# Altium PCB sallenKey_2.PcbDoc
Units mm, origin at the board's own origin, x right, y up, seen from the top; angles counter-clockwise.
Board outline 100 x 100 mm, 2 copper layers (Top Layer, Bottom Layer); 122 components, 58 nets, 265 pads, 18 vias.
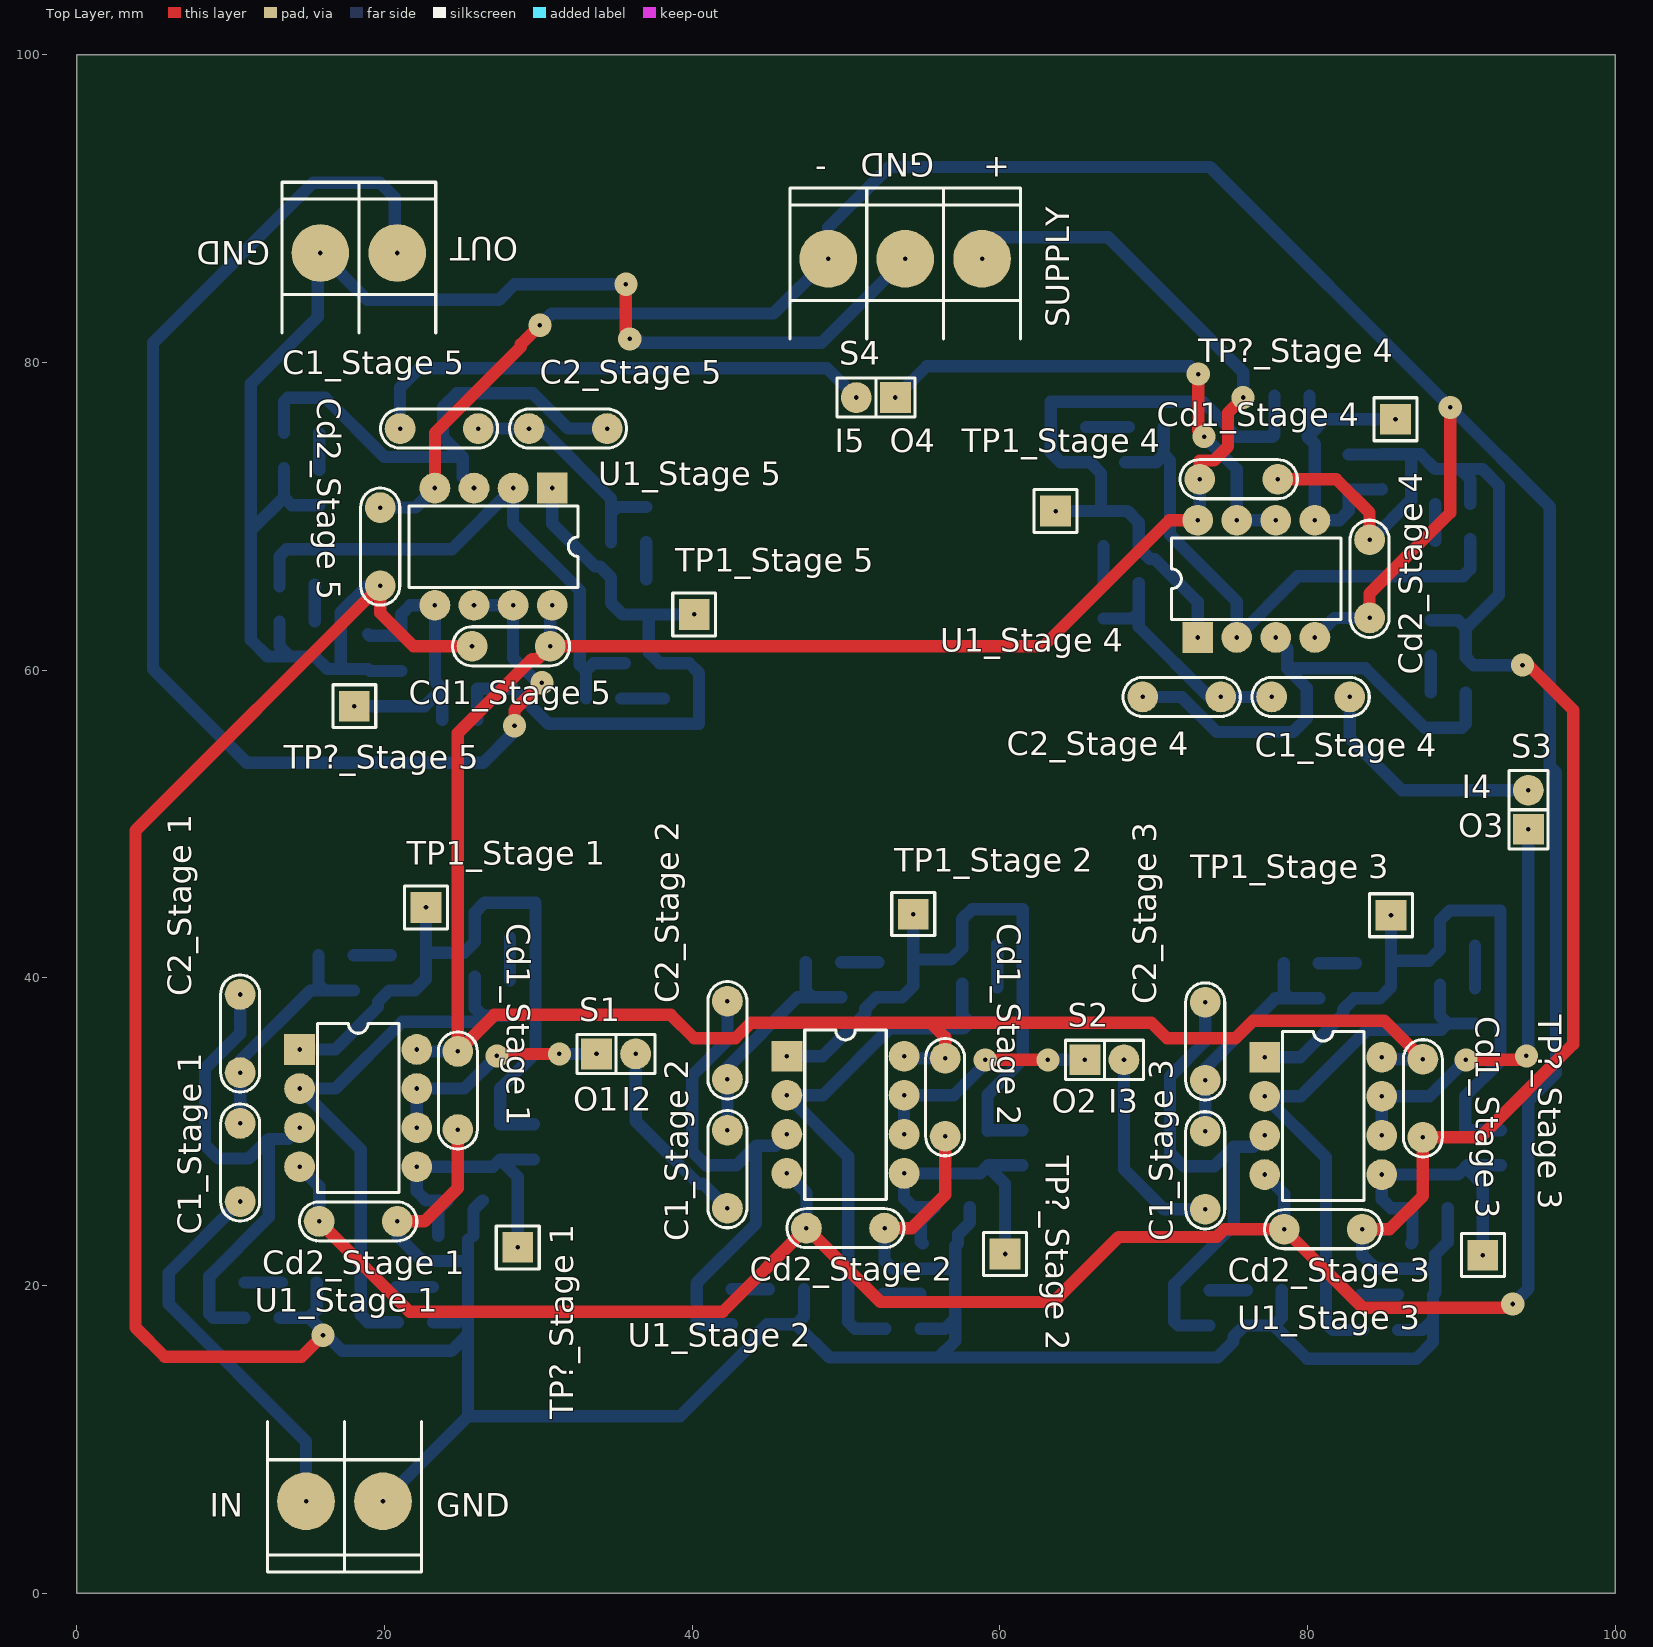
[diagram p0: Top Layer view]
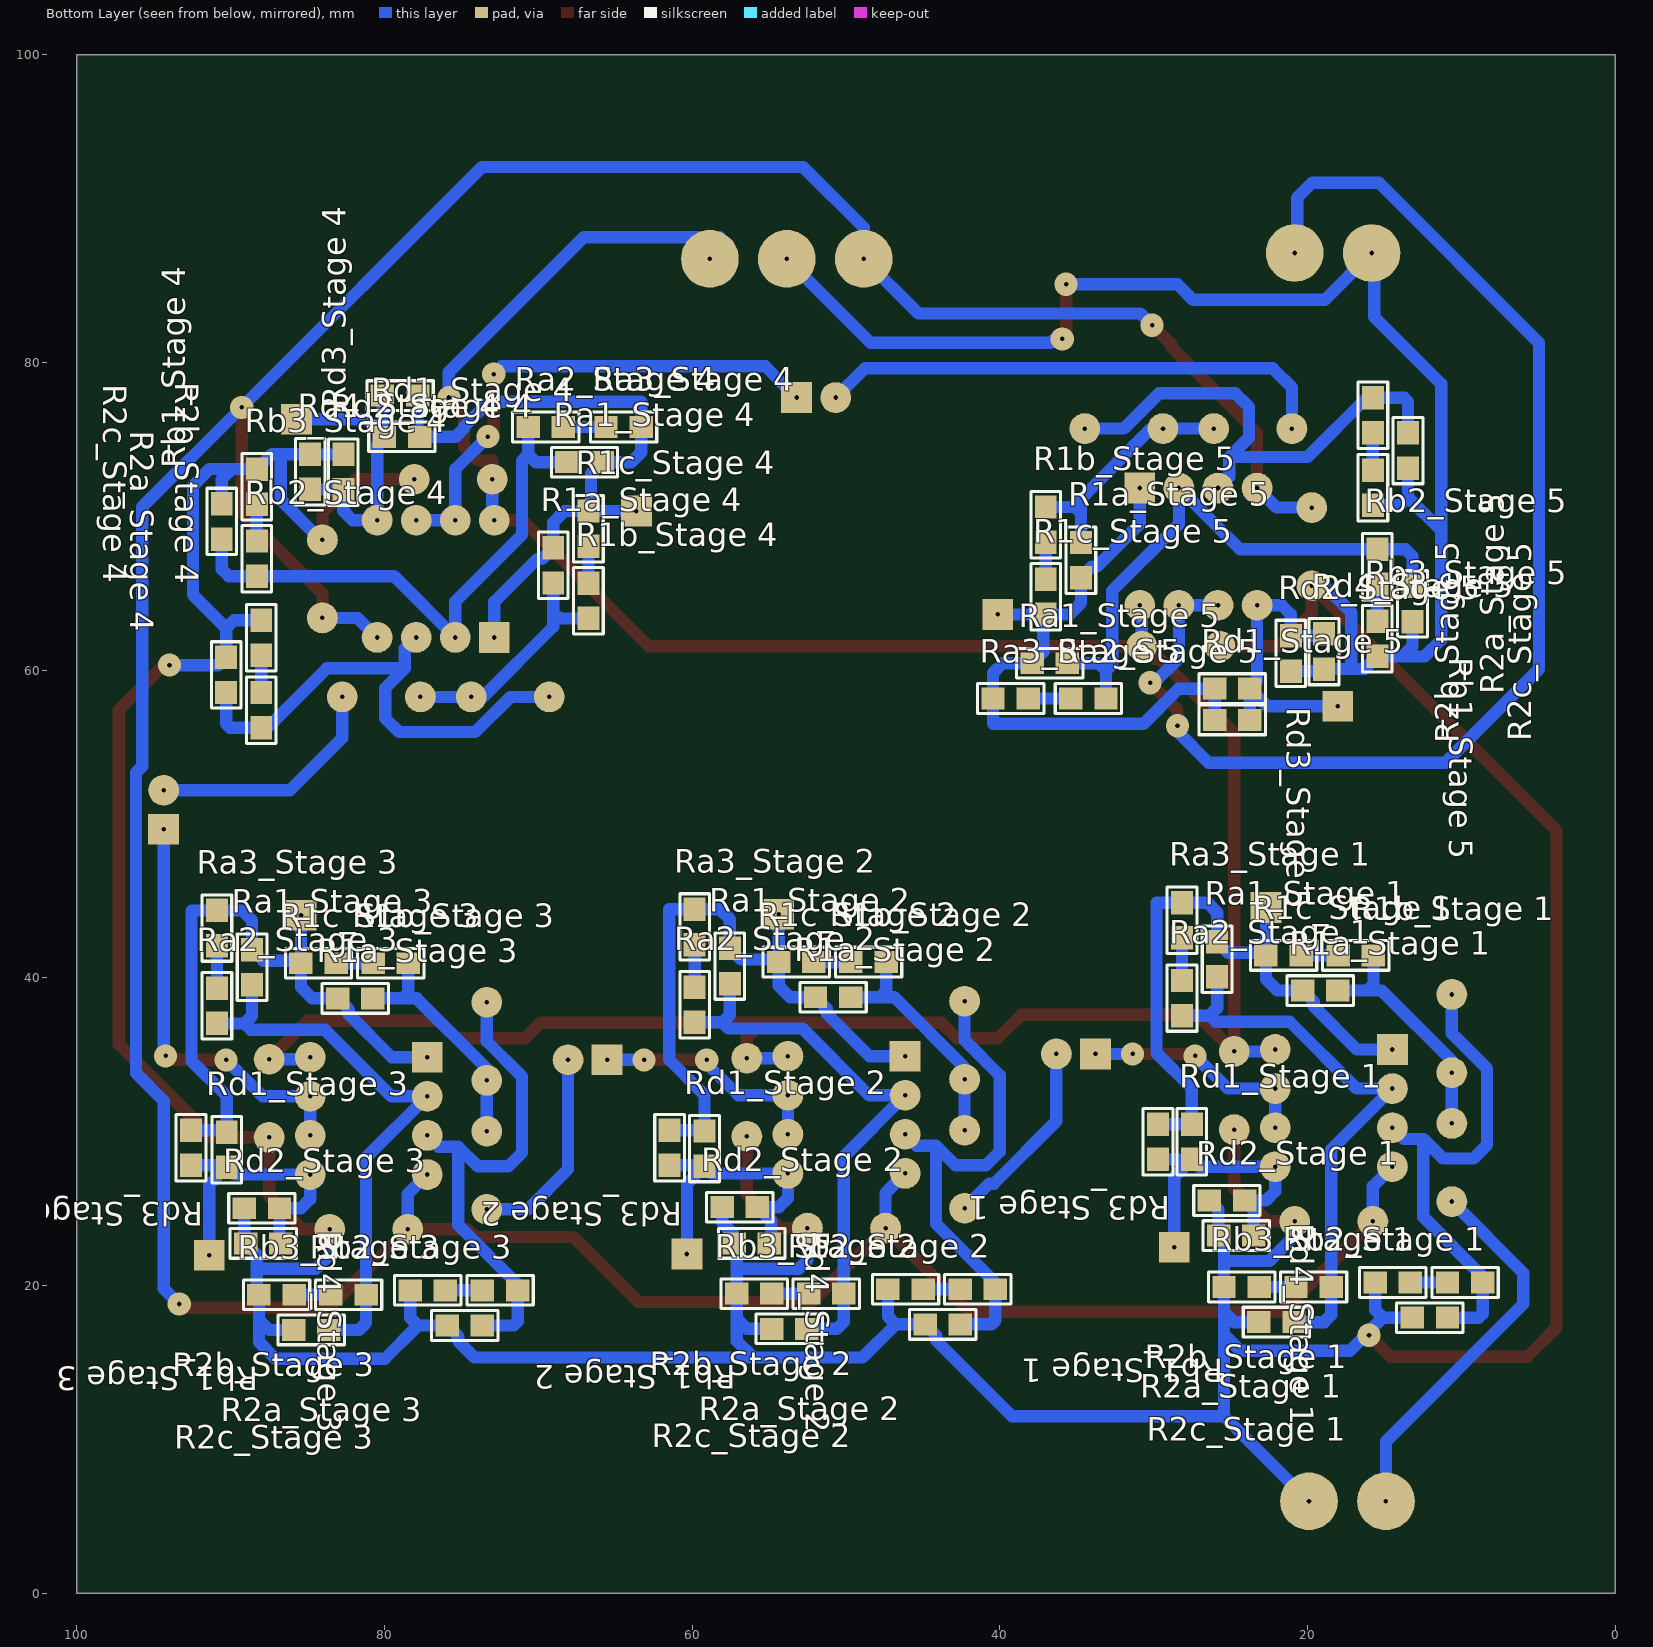
[diagram p1: Bottom Layer view, seen from below]
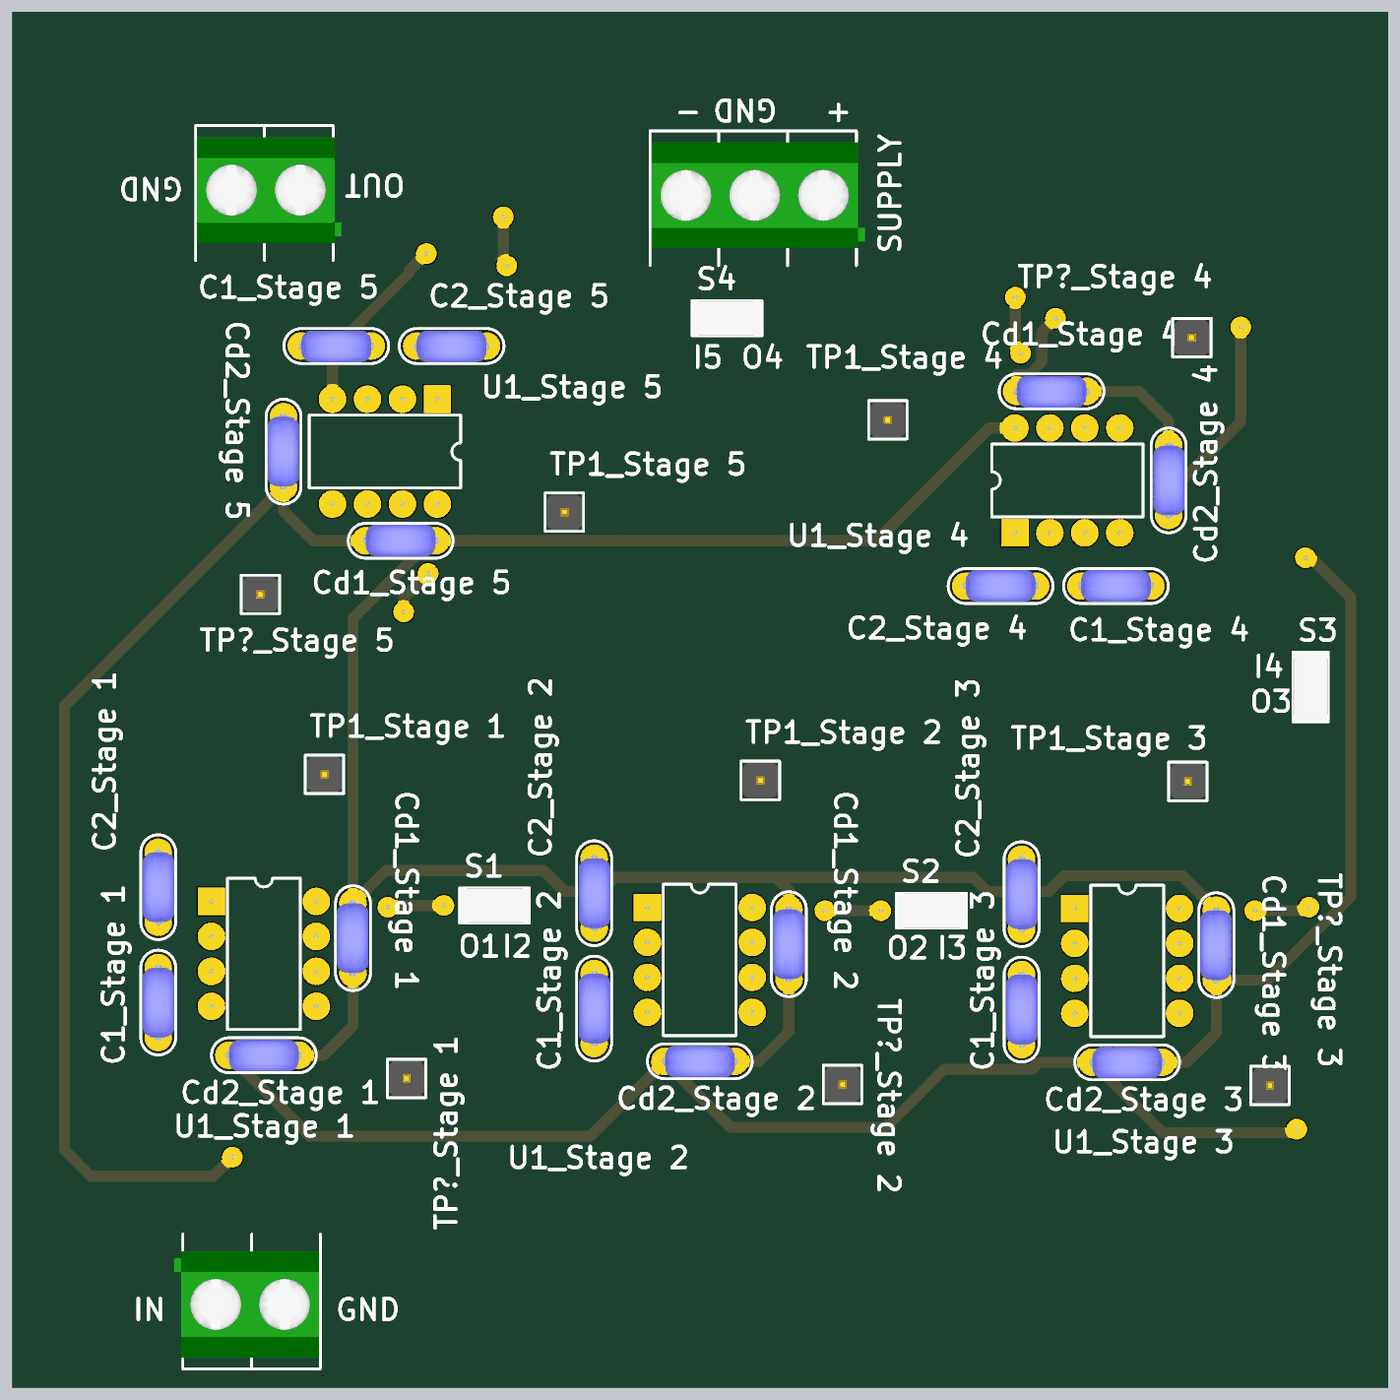
[diagram p2: 3D render of the assembled board from above, using the file's embedded part models]
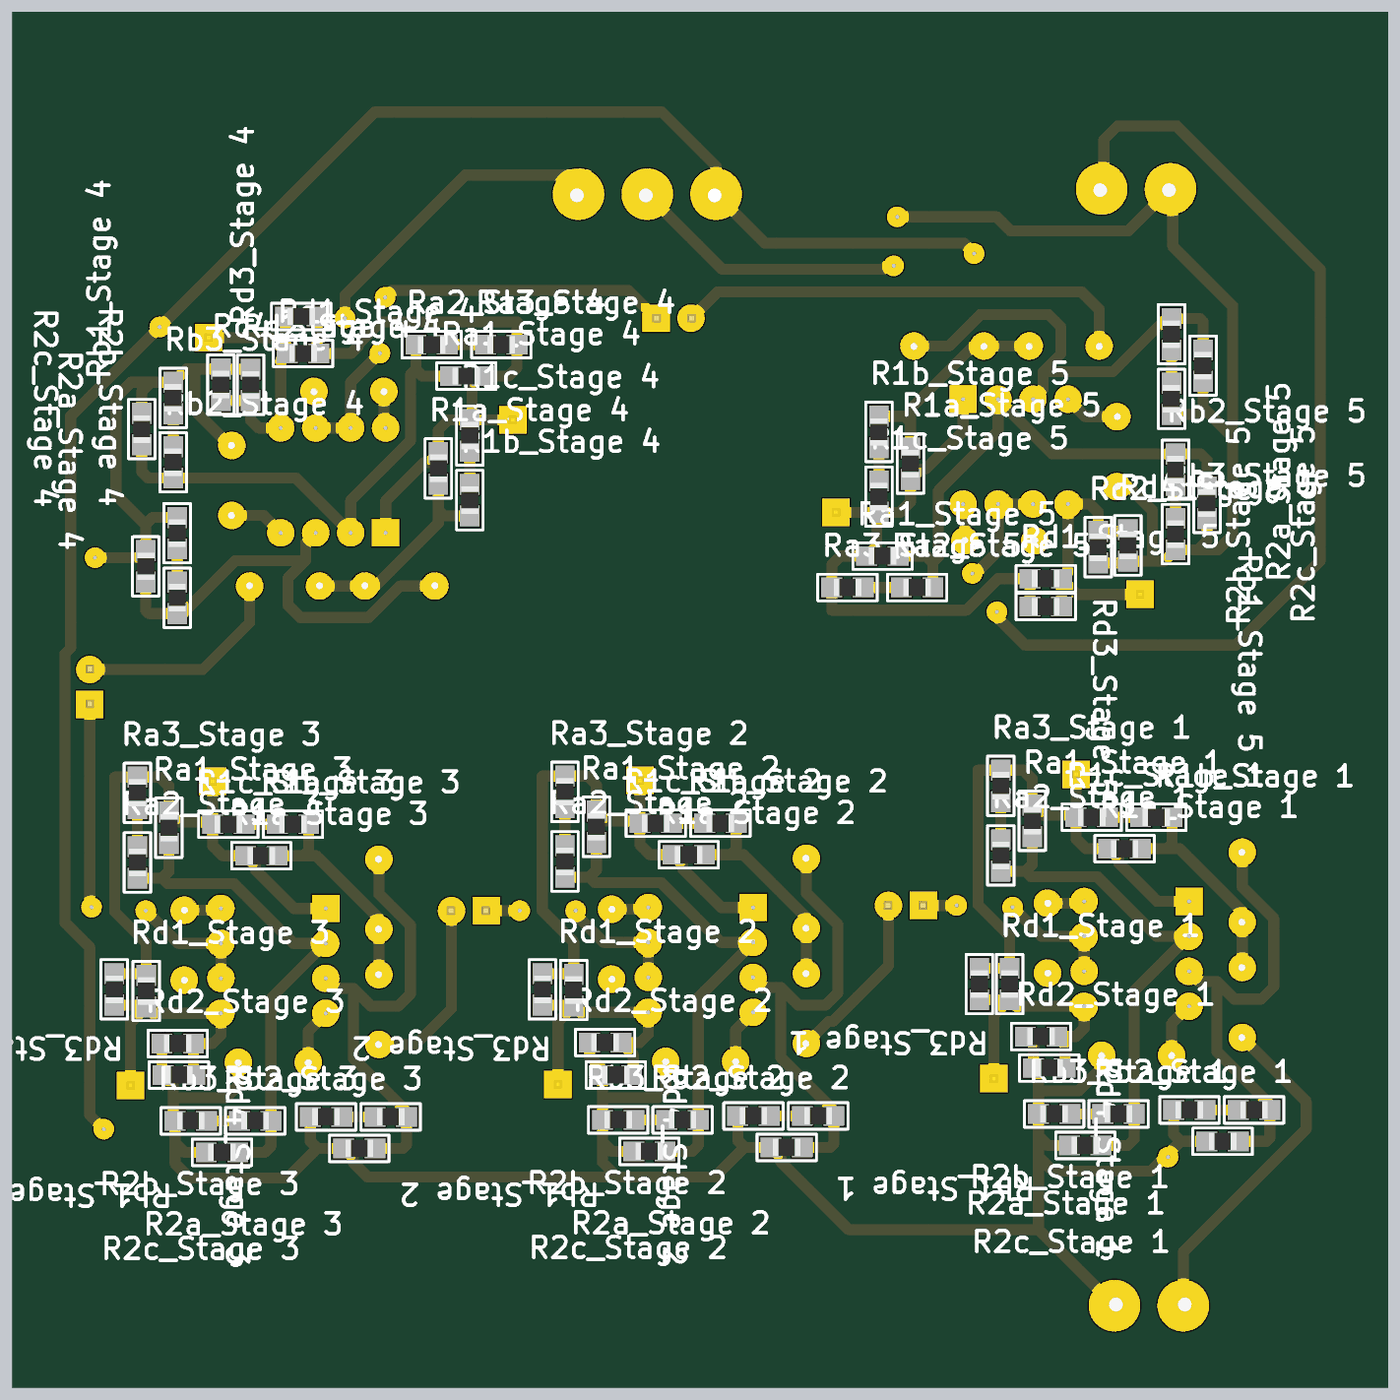
[diagram p3: 3D render of the assembled board from below, using the file's embedded part models]

## Layer stack, top to bottom
Top Solder: solder mask 0.0102, Solder Resist, Dk 3.5
Top Layer: signal copper 0.0356
Dielectric 1: dielectric 0.32, FR-4, Dk 4.8
Bottom Layer: signal copper 0.0356
Bottom Solder: solder mask 0.0102, Solder Resist, Dk 3.5

## Board outline
0,0 100,0 100,100 0,100

## Design rules (kind name [scope] priority, off if disabled: settings)
Clearance [All] p1: gap=0.4 ignorepadtopadclearanceinfootprint=FALSE
PolygonConnect [All] p1: connectstyle=Relief reliefconductorwidth=0.254 reliefentries=4 polygonreliefangle="90 Angle" airgapwidth=0.254
RoomDefinition "Stage 5" [InComponentClass('Stage 5')] p1: confinementstyle=ConfineIn formatcopy=TRUE lockcomponents=FALSE outline 9.906,55.626 43.815,55.626 43.815,79.462 9.906,79.462
RoomDefinition "Stage 4" [InComponentClass('Stage 4')] p2: confinementstyle=ConfineIn formatcopy=TRUE lockcomponents=FALSE outline 93.853,80.137 59.944,80.137 59.944,54.508 93.853,54.508
RoomDefinition "Stage 3" [InComponentClass('Stage 3')] p3: confinementstyle=ConfineIn formatcopy=TRUE lockcomponents=FALSE outline 93.98,13.843 93.98,47.752 69.596,47.752 69.596,13.843
RoomDefinition "Stage 2" [InComponentClass('Stage 2')] p4: confinementstyle=ConfineIn formatcopy=TRUE lockcomponents=FALSE outline 62.738,13.914 62.738,47.823 38.537,47.823 38.537,13.914
RoomDefinition "Stage 1" [InComponentClass('Stage 1')] p5: confinementstyle=ConfineIn formatcopy=TRUE lockcomponents=FALSE outline 30.861,14.351 30.861,48.26 6.858,48.26 6.858,14.351
RoutingVias [All] p1: holewidth=0.3 width=2 viastyle="Through Hole" minholewidth=0.3 minwidth=2 maxholewidth=0.3 maxwidth=2
SolderMaskExpansion [All] p1: expansion=0.102
Width [All] p1: maxlimit=0.9 minlimit=0.7 preferedwidth=0.8
30 further rules are at their usual default settings.

## Classes and differential pairs
channel class filtroFinal: "Stage 1" "Stage 2" "Stage 3" "Stage 4" "Stage 5"
component class "Stage 5": "C1_Stage 5" "C2_Stage 5" "Cd1_Stage 5" "Cd2_Stage 5" "R1a_Stage 5" "R1b_Stage 5" "R1c_Stage 5" "R2a_Stage 5" "R2b_Stage 5" "R2c_Stage 5" "Ra1_Stage 5" "Ra2_Stage 5" "Ra3_Stage 5" "Rb1_Stage 5" "Rb2_Stage 5" "Rb3_Stage 5" "Rd1_Stage 5" "Rd2_Stage 5" "Rd3_Stage 5" "Rd4_Stage 5" "TP1_Stage 5" "TP?_Stage 5" "U1_Stage 5"
component class "Stage 4": "C1_Stage 4" "C2_Stage 4" "Cd1_Stage 4" "Cd2_Stage 4" "R1a_Stage 4" "R1b_Stage 4" "R1c_Stage 4" "R2a_Stage 4" "R2b_Stage 4" "R2c_Stage 4" "Ra1_Stage 4" "Ra2_Stage 4" "Ra3_Stage 4" "Rb1_Stage 4" "Rb2_Stage 4" "Rb3_Stage 4" "Rd1_Stage 4" "Rd2_Stage 4" "Rd3_Stage 4" "Rd4_Stage 4" "TP1_Stage 4" "TP?_Stage 4" "U1_Stage 4"
component class "Stage 3": "C1_Stage 3" "C2_Stage 3" "Cd1_Stage 3" "Cd2_Stage 3" "R1a_Stage 3" "R1b_Stage 3" "R1c_Stage 3" "R2a_Stage 3" "R2b_Stage 3" "R2c_Stage 3" "Ra1_Stage 3" "Ra2_Stage 3" "Ra3_Stage 3" "Rb1_Stage 3" "Rb2_Stage 3" "Rb3_Stage 3" "Rd1_Stage 3" "Rd2_Stage 3" "Rd3_Stage 3" "Rd4_Stage 3" "TP1_Stage 3" "TP?_Stage 3" "U1_Stage 3"
component class "Stage 2": "C1_Stage 2" "C2_Stage 2" "Cd1_Stage 2" "Cd2_Stage 2" "R1a_Stage 2" "R1b_Stage 2" "R1c_Stage 2" "R2a_Stage 2" "R2b_Stage 2" "R2c_Stage 2" "Ra1_Stage 2" "Ra2_Stage 2" "Ra3_Stage 2" "Rb1_Stage 2" "Rb2_Stage 2" "Rb3_Stage 2" "Rd1_Stage 2" "Rd2_Stage 2" "Rd3_Stage 2" "Rd4_Stage 2" "TP1_Stage 2" "TP?_Stage 2" "U1_Stage 2"
component class "Stage 1": "C1_Stage 1" "C2_Stage 1" "Cd1_Stage 1" "Cd2_Stage 1" "R1a_Stage 1" "R1b_Stage 1" "R1c_Stage 1" "R2a_Stage 1" "R2b_Stage 1" "R2c_Stage 1" "Ra1_Stage 1" "Ra2_Stage 1" "Ra3_Stage 1" "Rb1_Stage 1" "Rb2_Stage 1" "Rb3_Stage 1" "Rd1_Stage 1" "Rd2_Stage 1" "Rd3_Stage 1" "TP1_Stage 1" "TP?_Stage 1" "U1_Stage 1"
component class finalFilter: IN OUT S1 S2 S3 S4 SUPPLY

## Components (designator, comment, footprint, x,y, rotation, side; value= is the part's Value field where it differs from the comment)
"C1_Stage 1" "CAP" CAP200 10.612,27.996 r90 top (schematic designator C1)
"C1_Stage 2" "CAP" CAP200 42.291,27.559 r90 top (schematic designator C1)
"C1_Stage 3" "CAP" CAP200 73.35,27.488 r90 top (schematic designator C1)
"C1_Stage 4" "CAP" CAP200 80.208,58.262 r180 top (schematic designator C1)
"C1_Stage 5" "CAP" CAP200 23.551,75.707 r0 top (schematic designator C1)
"C2_Stage 1" "CAP" CAP200 10.612,36.378 r90 top (schematic designator C2)
"C2_Stage 2" "CAP" CAP200 42.291,35.941 r90 top (schematic designator C2)
"C2_Stage 3" "CAP" CAP200 73.35,35.87 r90 top (schematic designator C2)
"C2_Stage 4" "CAP" CAP200 71.826,58.262 r180 top (schematic designator C2)
"C2_Stage 5" "CAP" CAP200 31.933,75.707 r0 top (schematic designator C2)
"Cd1_Stage 1" "CAP" CAP200 24.765,32.674 r270 top (schematic designator Cd1)
"Cd1_Stage 2" "CAP" CAP200 56.444,32.238 r270 top (schematic designator Cd1)
"Cd1_Stage 3" "CAP" CAP200 87.503,32.166 r270 top (schematic designator Cd1)
"Cd1_Stage 4" "CAP" CAP200 75.53,72.415 r0 top (schematic designator Cd1)
"Cd1_Stage 5" "CAP" CAP200 28.229,61.555 r180 top (schematic designator Cd1)
"Cd2_Stage 1" "CAP" CAP200 18.288,24.165 r0 top (schematic designator Cd2)
"Cd2_Stage 2" "CAP" CAP200 49.967,23.729 r0 top (schematic designator Cd2)
"Cd2_Stage 3" "CAP" CAP200 81.026,23.657 r0 top (schematic designator Cd2)
"Cd2_Stage 4" "CAP" CAP200 84.039,65.938 r90 top (schematic designator Cd2)
"Cd2_Stage 5" "CAP" CAP200 19.72,68.032 r270 top (schematic designator Cd2)
IN "BORNERA 2" BORNERA2 17.399,5.969 r90 top
OUT "BORNERA 2" BORNERA2 18.328,87.122 r270 top
"R1a_Stage 1" "RES" 0805 19.162,39.172 r180 bottom (schematic designator R1a)
"R1a_Stage 2" "RES" 0805 50.841,38.735 r180 bottom (schematic designator R1a)
"R1a_Stage 3" "RES" 0805 81.9,38.664 r180 bottom (schematic designator R1a)
"R1a_Stage 4" "RES" 0805 69.032,66.812 r270 bottom (schematic designator R1a)
"R1a_Stage 5" "RES" 0805 34.727,67.157 r90 bottom (schematic designator R1a)
"R1b_Stage 1" "RES" 0805 16.856,41.458 r180 bottom (schematic designator R1b)
"R1b_Stage 2" "RES" 0805 48.534,41.021 r180 bottom (schematic designator R1b)
"R1b_Stage 3" "RES" 0805 79.594,40.95 r180 bottom (schematic designator R1b)
"R1b_Stage 4" "RES" 0805 66.746,64.506 r270 bottom (schematic designator R1b)
"R1b_Stage 5" "RES" 0805 37.013,69.464 r90 bottom (schematic designator R1b)
"R1c_Stage 1" "RES" 0805 21.555,41.458 r180 bottom (schematic designator R1c)
"R1c_Stage 2" "RES" 0805 53.233,41.021 r180 bottom (schematic designator R1c)
"R1c_Stage 3" "RES" 0805 84.293,40.95 r180 bottom (schematic designator R1c)
"R1c_Stage 4" "RES" 0805 66.746,69.205 r270 bottom (schematic designator R1c)
"R1c_Stage 5" "RES" 0805 37.013,64.765 r90 bottom (schematic designator R1c)
"R2a_Stage 1" "RES" 0805 12.04,17.907 r180 bottom (schematic designator R2a)
"R2a_Stage 2" "RES" 0805 43.719,17.47 r180 bottom (schematic designator R2a)
"R2a_Stage 3" "RES" 0805 74.778,17.399 r180 bottom (schematic designator R2a)
"R2a_Stage 4" "RES" 0805 90.297,59.69 r270 bottom (schematic designator R2a)
"R2a_Stage 5" "RES" 0805 13.462,74.28 r90 bottom (schematic designator R2a)
"R2b_Stage 1" "RES" 0805 9.754,20.193 r180 bottom (schematic designator R2b)
"R2b_Stage 2" "RES" 0805 41.433,19.756 r180 bottom (schematic designator R2b)
"R2b_Stage 3" "RES" 0805 72.492,19.685 r180 bottom (schematic designator R2b)
"R2b_Stage 4" "RES" 0805 88.011,57.404 r270 bottom (schematic designator R2b)
"R2b_Stage 5" "RES" 0805 15.748,76.566 r90 bottom (schematic designator R2b)
"R2c_Stage 1" "RES" 0805 14.453,20.193 r180 bottom (schematic designator R2c)
"R2c_Stage 2" "RES" 0805 46.132,19.756 r180 bottom (schematic designator R2c)
"R2c_Stage 3" "RES" 0805 77.191,19.685 r180 bottom (schematic designator R2c)
"R2c_Stage 4" "RES" 0805 88.011,62.103 r270 bottom (schematic designator R2c)
"R2c_Stage 5" "RES" 0805 15.748,71.867 r90 bottom (schematic designator R2c)
"Ra1_Stage 1" "RES" 0805 25.873,41.204 r270 bottom (schematic designator Ra1)
"Ra1_Stage 2" "RES" 0805 57.551,40.767 r270 bottom (schematic designator Ra1)
"Ra1_Stage 3" "RES" 0805 88.611,40.696 r270 bottom (schematic designator Ra1)
"Ra1_Stage 4" "RES" 0805 67,73.523 r0 bottom (schematic designator Ra1)
"Ra1_Stage 5" "RES" 0805 36.759,60.447 r180 bottom (schematic designator Ra1)
"Ra2_Stage 1" "RES" 0805 28.159,38.684 r270 bottom (schematic designator Ra2)
"Ra2_Stage 2" "RES" 0805 59.837,38.247 r270 bottom (schematic designator Ra2)
"Ra2_Stage 3" "RES" 0805 90.897,38.176 r270 bottom (schematic designator Ra2)
"Ra2_Stage 4" "RES" 0805 69.52,75.809 r0 bottom (schematic designator Ra2)
"Ra2_Stage 5" "RES" 0805 34.239,58.161 r180 bottom (schematic designator Ra2)
"Ra3_Stage 1" "RES" 0805 28.159,43.744 r270 bottom (schematic designator Ra3)
"Ra3_Stage 2" "RES" 0805 59.837,43.307 r270 bottom (schematic designator Ra3)
"Ra3_Stage 3" "RES" 0805 90.897,43.236 r270 bottom (schematic designator Ra3)
"Ra3_Stage 4" "RES" 0805 64.46,75.809 r0 bottom (schematic designator Ra3)
"Ra3_Stage 5" "RES" 0805 39.299,58.161 r180 bottom (schematic designator Ra3)
"Rb1_Stage 1" "RES" 0805 22.017,17.618 r180 bottom (schematic designator Rb1)
"Rb1_Stage 2" "RES" 0805 53.696,17.181 r180 bottom (schematic designator Rb1)
"Rb1_Stage 3" "RES" 0805 84.755,17.11 r180 bottom (schematic designator Rb1)
"Rb1_Stage 4" "RES" 0805 90.586,69.667 r270 bottom (schematic designator Rb1)
"Rb1_Stage 5" "RES" 0805 13.173,64.302 r90 bottom (schematic designator Rb1)
"Rb2_Stage 1" "RES" 0805 19.604,19.904 r180 bottom (schematic designator Rb2)
"Rb2_Stage 2" "RES" 0805 51.283,19.467 r180 bottom (schematic designator Rb2)
"Rb2_Stage 3" "RES" 0805 82.342,19.396 r180 bottom (schematic designator Rb2)
"Rb2_Stage 4" "RES" 0805 88.3,67.254 r270 bottom (schematic designator Rb2)
"Rb2_Stage 5" "RES" 0805 15.459,66.715 r90 bottom (schematic designator Rb2)
"Rb3_Stage 1" "RES" 0805 24.283,19.904 r180 bottom (schematic designator Rb3)
"Rb3_Stage 2" "RES" 0805 55.962,19.467 r180 bottom (schematic designator Rb3)
"Rb3_Stage 3" "RES" 0805 87.021,19.396 r180 bottom (schematic designator Rb3)
"Rb3_Stage 4" "RES" 0805 88.3,71.933 r270 bottom (schematic designator Rb3)
"Rb3_Stage 5" "RES" 0805 15.459,62.037 r90 bottom (schematic designator Rb3)
"Rd1_Stage 1" "RES" 0805 27.519,29.337 r270 bottom (schematic designator Rd1)
"Rd1_Stage 2" "RES" 0805 59.197,28.9 r270 bottom (schematic designator Rd1)
"Rd1_Stage 3" "RES" 0805 90.257,28.829 r270 bottom (schematic designator Rd1)
"Rd1_Stage 4" "RES" 0805 78.867,75.169 r0 bottom (schematic designator Rd1)
"Rd1_Stage 5" "RES" 0805 24.892,58.801 r180 bottom (schematic designator Rd1)
"Rd2_Stage 1" "RES" 0805 25.233,25.527 r180 bottom (schematic designator Rd2)
"Rd2_Stage 2" "RES" 0805 56.911,25.09 r180 bottom (schematic designator Rd2)
"Rd2_Stage 3" "RES" 0805 87.971,25.019 r180 bottom (schematic designator Rd2)
"Rd2_Stage 4" "RES" 0805 82.677,72.883 r270 bottom (schematic designator Rd2)
"Rd2_Stage 5" "RES" 0805 21.082,61.087 r90 bottom (schematic designator Rd2)
"Rd3_Stage 1" "RES" 0805 29.718,29.337 r270 bottom (schematic designator Rd3)
"Rd3_Stage 2" "RES" 0805 61.468,28.956 r270 bottom (schematic designator Rd3)
"Rd3_Stage 3" "RES" 0805 92.583,28.956 r270 bottom (schematic designator Rd3)
"Rd3_Stage 4" "RES" 0805 78.994,77.851 r0 bottom (schematic designator Rd3)
"Rd3_Stage 5" "RES" 0805 24.892,56.769 r180 bottom (schematic designator Rd3)
"Rd4_Stage 1" "RES" 0805 24.638,23.241 r180 bottom (schematic designator Rd4)
"Rd4_Stage 2" "RES" 0805 56.134,22.733 r180 bottom (schematic designator Rd4)
"Rd4_Stage 3" "RES" 0805 87.884,22.733 r180 bottom (schematic designator Rd4)
"Rd4_Stage 4" "RES" 0805 84.836,72.898 r270 bottom (schematic designator Rd4)
"Rd4_Stage 5" "RES" 0805 18.923,61.214 r90 bottom (schematic designator Rd4)
S1 "JUMPER" JUMPER2 35.052,35.052 r0 top
S2 "JUMPER" JUMPER2 66.802,34.671 r0 top
S3 "JUMPER" JUMPER2 94.361,50.927 r90 top
S4 "JUMPER" JUMPER2 51.943,77.724 r180 top
SUPPLY "BORNERA 3" BORNERA3 53.848,86.741 r270 top
"TP1_Stage 1" "TP" TPTH 22.693,44.577 r180 top (schematic designator TP1)
"TP1_Stage 2" "TP" TPTH 54.371,44.14 r180 top (schematic designator TP1)
"TP1_Stage 3" "TP" TPTH 85.431,44.069 r180 top (schematic designator TP1)
"TP1_Stage 4" "TP" TPTH 63.627,70.343 r270 top (schematic designator TP1)
"TP1_Stage 5" "TP" TPTH 40.132,63.627 r90 top (schematic designator TP1)
"TP?_Stage 1" "TP" TPTH 28.662,22.479 r180 top (schematic designator TP?)
"TP?_Stage 2" "TP" TPTH 60.34,22.042 r180 top (schematic designator TP?)
"TP?_Stage 3" "TP" TPTH 91.4,21.971 r180 top (schematic designator TP?)
"TP?_Stage 4" "TP" TPTH 85.725,76.312 r270 top (schematic designator TP?)
"TP?_Stage 5" "TP" TPTH 18.034,57.658 r90 top (schematic designator TP?)
"U1_Stage 1" "TL082P" P008 18.288,31.531 r270 top (schematic designator U1)
"U1_Stage 2" "TL082P" P008 49.967,31.095 r270 top (schematic designator U1)
"U1_Stage 3" "TL082P" P008 81.026,31.023 r270 top (schematic designator U1)
"U1_Stage 4" "TL082P" P008 76.673,65.938 r0 top (schematic designator U1)
"U1_Stage 5" "TL082P" P008 27.086,68.032 r180 top (schematic designator U1)

## Footprints (in the part's own frame and the unit in brackets; to place one, negate y for a bottom-side part, rotate by r counter-clockwise, add the part's x,y. Pads: shape width x height; smd on the part's side, far side on the other; paste and mask are expansions set on the pad)
0805 [mil] "Pasivo 0805"
  rect 60x56 smd: 1(-45,0) 2(45,0)
  silkscreen extent -85,-38 85,38, body extent -40,-25 39,25, height 15
BORNERA2 [mm] "Bornera con Tornillos 5mm separación"
  round 3.75 hole 0.3: 1(0,2.5) 2(0,-2.5)
  silkscreen extent -4.6,-5 5.2,5, body extent -3.76,-4.89 3.94,5.61, height 10
BORNERA3 [mm] "Bornera con Tornillos 5mm separación"
  round 3.75 hole 0.3: 1(0,5) 2(0,0) 3(0,-5)
  silkscreen extent -4.6,-7.5 5.2,7.5, body extent -3.76,-7.39 3.94,8.11, height 10.05
CAP200 [mm]
  round 2 hole 0.3: 1(-2.54,0) 2(2.54,0)
  silkscreen extent -3.81,-1.27 3.81,1.27, body extent -2.79,-1.17 2.79,1.12, height 6.24
JUMPER2 [mm]
  rect 2x2 hole 0.3: 1(-1.27,0)
  round 2 hole 0.3: 2(1.27,0)
  silkscreen extent -2.54,-1.27 2.54,1.27, body extent -2.46,-1.27 2.54,1.27, height 9.5
P008 [mm] "DIP; 8 Leads; Row Spacing 7.62 mm; Pitch 2.54 mm"
  rect 2x2 hole 0.3: 1(-3.81,-3.81)
  round 2 hole 0.3: 2(-1.27,-3.81) 3(1.27,-3.81) 4(3.81,-3.81) 5(3.81,3.81) 6(1.27,3.81) 7(-1.27,3.81) 8(-3.81,3.81)
  silkscreen extent -5.5,-2.65 5.5,2.65
TPTH [mm]
  rect 2x2 hole 0.3: 1(0,0)
  silkscreen extent -1.4,-1.4 1.4,1.4, body extent -1.27,-1.27 1.27,1.27, height 6.04

## Part data
"U1_Stage 1" "U1_Stage 2" "U1_Stage 3" "U1_Stage 4" "U1_Stage 5": "JFET-Input Operational Amplifier", Code_JEDEC=MO-001-AN, ComponentLink1Description="Manufacturer Link", ComponentLink1URL=http://www.ti.com/, ComponentLink2Description=Datasheet, ComponentLink2URL=http://www-s.ti.com/sc/ds/tl082.pdf, DatasheetVersion=Feb-1999, LatestRevisionDate=04-Mar-2005, LatestRevisionNote="Stylized 3D Model Added.", PackageDescription="DIP; 8 Leads; Row Spacing 7.62 mm; Pitch 2.54 mm", PackageReference=P008, PackageVersion=Jun-1999, Published=16-Jan-2001, Publisher="Altium Limited"

## Via types
v1: diameter 1.5, hole 0.3, Top Layer to Bottom Layer, 18 vias

## Nets (pads, with @x,y where several pads share a name; then routed paths per layer and width w, separated by ;. In a path a pad name is that pad's centre, name@x,y a point inside that pad or via, vN(x,y) a via of type N, cw(c..) or ccw(c..) an arc to the next point about the centre after c; other vN are vias at no path point)
GND: "Cd1_Stage 1.2" "Cd1_Stage 2.2" "Cd1_Stage 3.2" "Cd1_Stage 4.2" "Cd1_Stage 5.2" "Cd2_Stage 1.2" "Cd2_Stage 2.2" "Cd2_Stage 3.2" "Cd2_Stage 4.2" "Cd2_Stage 5.2" "R2a_Stage 1.1" "R2a_Stage 2.1" "R2a_Stage 3.1" "R2a_Stage 4.1" "R2a_Stage 5.1" "R2c_Stage 1.1" "R2c_Stage 2.1" "R2c_Stage 3.1" "R2c_Stage 4.1" "R2c_Stage 5.1" "Rb1_Stage 1.1" "Rb1_Stage 2.1" "Rb1_Stage 3.1" "Rb1_Stage 4.1" "Rb1_Stage 5.1" "Rb3_Stage 1.1" "Rb3_Stage 2.1" "Rb3_Stage 3.1" "Rb3_Stage 4.1" "Rb3_Stage 5.1" "Rd2_Stage 1.1" "Rd2_Stage 2.1" "Rd2_Stage 3.1" "Rd2_Stage 4.1" "Rd2_Stage 5.1" "Rd4_Stage 1.1" "Rd4_Stage 2.1" "Rd4_Stage 3.1" "Rd4_Stage 4.1" "Rd4_Stage 5.1" IN.2 OUT.2 SUPPLY.2 | length 447.4
  Top Layer w0.8: v1(16.002,16.764) 14.605,15.367 5.715,15.367 3.81,17.272 3.81,49.581 19.72,65.492 19.72,63.719 21.884,61.555 25.689,61.555 ; 20.828,24.165 22.601,24.165 24.765,26.329 24.765,30.134 ; v1(35.687,85.09) 35.687,81.788 v1(35.941,81.534) ; 52.507,23.729 54.28,23.729 56.444,25.893 56.444,29.698 ; 78.07,72.415 81.875,72.415 84.039,70.251 84.039,68.478 ; 83.566,23.657 85.339,23.657 87.503,25.821 87.503,29.626 91.221,29.626 97.282,35.687 97.282,57.404 94.361,60.325 v1(93.98,60.325)
  Bottom Layer w0.8: 13.173,63.159 13.173,61.56 13.839,60.894 ; 13.183,17.907 15.088,17.907 ; 13.462,73.137 13.462,71.232 ; 15.596,20.193 15.596,18.415 15.088,17.907 ; 15.748,70.724 13.97,70.724 13.462,71.232 ; 19.72,65.492 18.883,65.492 17.145,63.754 17.145,60.071 ; IN.2 25.426,11.496 ; 20.828,24.165 20.828,23.241 22.479,21.59 25.426,21.59 ; 21.082,59.944 19.05,59.944 18.923,60.071 17.145,60.071 ; 23.16,17.618 24.76,17.618 25.426,18.284 ; 25.426,22.987 25.426,21.59 ; 25.781,23.241 25.781,24.932 26.376,25.527 ; v1(35.687,85.09) 28.448,85.09 27.432,84.074 18.876,84.074 OUT.2 15.661,86.955 15.661,82.971 11.303,78.613 11.303,69.073 ; v1(35.941,81.534) 36.449,81.534 36.703,81.28 48.387,81.28 SUPPLY.2 ; 47.275,19.756 47.275,17.978 46.767,17.47 ; 52.507,23.729 52.507,21.638 53.063,21.082 57.105,21.082 ; 54.839,17.181 56.439,17.181 57.105,17.847 ; 58.054,25.09 58.054,24.1 57.277,23.322 57.277,22.733 57.105,22.561 57.105,21.082 ; 78.334,19.685 78.334,17.907 77.826,17.399 ; 82.677,74.026 84.821,74.026 84.836,74.041 86.741,74.041 ; 83.566,23.657 83.566,21.971 84.455,21.082 88.303,21.082 ; 84.039,68.478 84.164,68.478 86.741,71.055 86.741,74.041 ; 85.898,17.11 87.498,17.11 88.164,17.776 ; 88.011,63.246 89.789,63.246 90.297,62.738 ; 89.114,25.019 89.114,22.82 89.027,22.733 88.303,22.009 88.303,21.082 ; 90.586,70.81 90.586,72.41 89.92,73.076 ; v1(93.98,60.325) 90.805,60.325 90.297,60.833 90.297,62.738 ; 11.303,69.073 11.303,61.976 12.385,60.894 13.839,60.894 ; 11.303,69.073 13.462,71.232 ; 13.839,60.894 15.459,60.894 16.281,60.071 17.145,60.071 ; 15.088,17.907 17.247,15.748 24.344,15.748 25.426,16.83 ; 25.426,11.496 39.206,11.496 44.138,16.428 44.138,16.746 44.862,17.47 46.767,17.47 ; 25.426,11.496 25.426,16.83 ; 25.426,16.83 25.426,18.284 ; 25.426,18.284 25.426,19.904 25.426,21.59 ; 46.767,17.47 48.926,15.311 56.022,15.311 ; 56.022,15.311 74.152,15.311 75.197,16.356 75.197,16.675 75.921,17.399 77.826,17.399 ; 56.022,15.311 57.105,16.393 57.105,17.847 ; 57.105,17.847 57.105,19.467 57.105,21.082 ; 77.826,17.399 79.985,15.24 87.082,15.24 88.164,16.322 88.164,17.776 ; 86.741,74.041 87.335,74.041 88.3,73.076 89.92,73.076 ; 88.164,17.776 88.164,19.396 88.303,19.535 88.303,21.082 ; 89.92,73.076 91.374,73.076 92.456,71.994 92.456,64.897 90.297,62.738
"NetC1_Stage 1_1": "C1_Stage 1.1" IN.1 | length 25.1
  Bottom Layer w0.8: 10.612,25.456 5.969,20.813 5.969,18.796 14.899,9.866 IN.1
"NetC1_Stage 1_2": "C1_Stage 1.2" "C2_Stage 1.1" "R1a_Stage 1.2" "R1b_Stage 1.2" | length 15.8
  Bottom Layer w0.8: 10.612,30.536 10.612,33.838 10.612,34.607 15.177,39.172 16.114,39.172 ; 15.713,41.458 15.713,39.573 16.114,39.172 ; 18.019,39.172 16.114,39.172
"NetC1_Stage 2_1": "C1_Stage 2.1" S1.2 | length 12.7
  Bottom Layer w0.8: S1.2 36.322,30.688 40.397,26.613 40.697,26.613 42.291,25.019
"NetC1_Stage 2_2": "C1_Stage 2.2" "C2_Stage 2.1" "R1a_Stage 2.2" "R1b_Stage 2.2" | length 15.8
  Bottom Layer w0.8: 42.291,30.099 42.291,33.401 42.291,34.17 46.856,38.735 47.793,38.735 ; 47.391,41.021 47.391,39.136 47.793,38.735 ; 49.698,38.735 47.793,38.735
"NetC1_Stage 3_1": "C1_Stage 3.1" S2.2 | length 13.5
  Bottom Layer w0.8: S2.2 68.072,27.559 70.683,24.948 73.35,24.948
"NetC1_Stage 3_2": "C1_Stage 3.2" "C2_Stage 3.1" "R1a_Stage 3.2" "R1b_Stage 3.2" | length 15.8
  Bottom Layer w0.8: 73.35,30.028 73.35,33.33 73.35,34.099 77.915,38.664 78.852,38.664 ; 78.451,40.95 78.451,39.065 78.852,38.664 ; 80.757,38.664 78.852,38.664
"NetC1_Stage 4_1": "C1_Stage 4.1" S3.2 | length 15.7
  Bottom Layer w0.8: 82.748,58.262 82.748,55.595 86.146,52.197 S3.2
"NetC1_Stage 4_2": "C1_Stage 4.2" "C2_Stage 4.1" "R1a_Stage 4.2" "R1b_Stage 4.2" | length 15.8
  Bottom Layer w0.8: 66.746,63.363 68.631,63.363 69.032,63.764 ; 69.032,65.669 69.032,63.764 ; 77.668,58.262 74.366,58.262 73.597,58.262 69.032,62.827 69.032,63.764
"NetC1_Stage 5_1": "C1_Stage 5.1" S4.2 | length 33.6
  Bottom Layer w0.8: 21.011,75.707 21.011,78.374 22.265,79.629 48.768,79.629 S4.2
"NetC1_Stage 5_2": "C1_Stage 5.2" "C2_Stage 5.1" "R1a_Stage 5.2" "R1b_Stage 5.2" | length 15.8
  Bottom Layer w0.8: 26.091,75.707 29.393,75.707 30.162,75.707 34.727,71.143 34.727,70.205 ; 34.727,68.3 34.727,70.205 ; 37.013,70.607 35.128,70.607 34.727,70.205
"NetC2_Stage 1_2": "C2_Stage 1.2" "R2a_Stage 1.2" "R2b_Stage 1.2" "U1_Stage 1.3" | length 33.4
  Bottom Layer w0.8: 10.612,38.918 10.612,36.383 8.326,34.097 8.326,29.139 9.215,28.25 11.195,28.25 12.466,29.521 ; 10.897,17.907 8.865,17.907 8.611,18.161 8.611,20.193 8.611,20.589 12.466,24.445 12.466,29.521 ; 14.478,30.261 13.738,29.521 12.466,29.521
"NetC2_Stage 2_2": "C2_Stage 2.2" "R2a_Stage 2.2" "R2b_Stage 2.2" "U1_Stage 2.3" | length 33.4
  Bottom Layer w0.8: 42.291,38.481 42.291,35.947 40.005,33.661 40.005,28.702 40.894,27.813 42.874,27.813 44.145,29.085 ; 42.576,17.47 40.544,17.47 40.29,17.724 40.29,19.756 40.29,20.153 44.145,24.008 44.145,29.085 ; 46.157,29.825 45.417,29.085 44.145,29.085
"NetC2_Stage 3_2": "C2_Stage 3.2" "R2a_Stage 3.2" "R2b_Stage 3.2" "U1_Stage 3.3" | length 33.4
  Bottom Layer w0.8: 73.35,38.41 73.35,35.875 71.064,33.589 71.064,28.631 71.953,27.742 73.933,27.742 75.204,29.013 ; 73.635,17.399 71.603,17.399 71.349,17.653 71.349,19.685 71.349,20.081 75.204,23.937 75.204,29.013 ; 77.216,29.753 76.476,29.013 75.204,29.013
"NetC2_Stage 4_2": "C2_Stage 4.2" "R2a_Stage 4.2" "R2b_Stage 4.2" "U1_Stage 4.3" | length 33.4
  Bottom Layer w0.8: 69.286,58.262 71.821,58.262 74.107,55.976 79.065,55.976 79.954,56.865 79.954,58.845 78.683,60.116 ; 77.943,62.128 78.683,61.388 78.683,60.116 ; 90.297,58.547 90.297,56.515 90.043,56.261 88.011,56.261 87.615,56.261 83.759,60.116 78.683,60.116
"NetC2_Stage 5_2": "C2_Stage 5.2" "R2a_Stage 5.2" "R2b_Stage 5.2" "U1_Stage 5.3" | length 33.4
  Bottom Layer w0.8: 13.462,75.423 13.462,77.455 13.716,77.709 15.748,77.709 16.144,77.709 20,73.853 25.076,73.853 ; 25.816,71.842 25.076,72.582 25.076,73.853 ; 34.473,75.707 31.938,75.707 29.652,77.993 24.694,77.993 23.805,77.104 23.805,75.125 25.076,73.853
NetOUT_1: "U1_Stage 5.6" "U1_Stage 5.7" OUT.1 | length 84.6
  Top Layer w0.8: v1(28.448,56.388) 28.448,57.404 v1(30.226,59.182)
  Bottom Layer w0.8: OUT.1 20.661,87.289 20.661,90.718 19.685,91.694 15.367,91.694 4.953,81.28 4.953,60.071 11.049,53.975 26.416,53.975 28.448,56.007 v1(28.448,56.388) ; 25.816,64.222 28.356,64.222 28.356,60.798 29.972,59.182 v1(30.226,59.182)
"NetR1a_Stage 1_1": "R1a_Stage 1.1" "R1c_Stage 1.1" "Ra1_Stage 1.1" "Ra3_Stage 1.1" "Rd1_Stage 1.1" "Rd3_Stage 1.1" "TP1_Stage 1.1" "U1_Stage 1.1" | length 42.1
  Bottom Layer w0.8: 14.478,35.341 16.793,35.341 19.581,38.129 19.581,38.448 20.305,39.172 21.956,39.172 22.698,39.913 22.698,41.458 22.698,41.623 ; 22.693,44.577 22.698,44.572 22.698,41.623 ; 29.718,30.48 27.519,30.48 27.519,32.817 29.81,35.108 29.81,44.887 28.159,44.887 26.508,44.887 25.873,44.252 25.873,42.347 25.149,41.623 22.698,41.623
"NetR1a_Stage 2_1": "R1a_Stage 2.1" "R1c_Stage 2.1" "Ra1_Stage 2.1" "Ra3_Stage 2.1" "Rd1_Stage 2.1" "Rd3_Stage 2.1" "TP1_Stage 2.1" "U1_Stage 2.1" | length 42.2
  Bottom Layer w0.8: 46.157,34.905 48.472,34.905 51.26,37.692 51.26,38.011 51.984,38.735 53.635,38.735 54.376,39.477 54.376,41.021 54.376,41.186 ; 54.371,44.14 54.376,44.135 54.376,41.186 ; 61.468,30.099 59.253,30.099 59.197,30.043 59.197,32.38 61.488,34.671 61.488,44.45 59.837,44.45 58.186,44.45 57.551,43.815 57.551,41.91 56.827,41.186 54.376,41.186
"NetR1a_Stage 3_1": "R1a_Stage 3.1" "R1c_Stage 3.1" "Ra1_Stage 3.1" "Ra3_Stage 3.1" "Rd1_Stage 3.1" "Rd3_Stage 3.1" "TP1_Stage 3.1" "U1_Stage 3.1" | length 42.3
  Bottom Layer w0.8: 77.216,34.833 79.531,34.833 82.319,37.621 82.319,37.94 83.043,38.664 84.694,38.664 85.436,39.405 85.436,40.95 85.436,41.115 ; 85.431,44.069 85.436,44.064 85.436,41.115 ; 92.583,30.099 90.384,30.099 90.257,29.972 90.257,32.309 92.548,34.6 92.548,44.379 90.897,44.379 89.246,44.379 88.611,43.744 88.611,41.839 87.887,41.115 85.436,41.115
"NetR1a_Stage 4_1": "R1a_Stage 4.1" "R1c_Stage 4.1" "Ra1_Stage 4.1" "Ra3_Stage 4.1" "Rd1_Stage 4.1" "Rd3_Stage 4.1" "TP1_Stage 4.1" "U1_Stage 4.1" | length 42.7
  Bottom Layer w0.8: 63.627,70.343 63.632,70.348 66.581,70.348 ; 72.863,62.128 72.863,64.443 70.075,67.231 69.756,67.231 69.032,67.955 69.032,69.606 68.291,70.348 66.746,70.348 66.581,70.348 ; 77.851,77.851 77.851,75.296 77.724,75.169 75.387,75.169 74.829,75.727 74.829,75.826 73.195,77.46 63.317,77.46 63.317,75.809 63.317,74.158 63.952,73.523 65.857,73.523 66.581,72.799 66.581,70.348
"NetR1a_Stage 5_1": "R1a_Stage 5.1" "R1c_Stage 5.1" "Ra1_Stage 5.1" "Ra3_Stage 5.1" "Rd1_Stage 5.1" "Rd3_Stage 5.1" "TP1_Stage 5.1" "U1_Stage 5.1" | length 41.9
  Bottom Layer w0.8: 26.035,56.769 26.035,58.801 28.372,58.801 30.663,56.51 40.442,56.51 40.442,58.161 40.442,59.812 39.807,60.447 37.902,60.447 37.178,61.171 37.178,63.622 ; 30.896,71.842 30.896,69.526 33.684,66.738 34.003,66.738 34.727,66.014 34.727,64.363 35.468,63.622 37.013,63.622 37.178,63.622 ; 40.132,63.627 40.127,63.622 37.178,63.622
"NetR1b_Stage 1_1": "R1b_Stage 1.1" "R1c_Stage 1.2" | length 2.4
  Bottom Layer w0.8: 17.999,41.458 20.412,41.458
"NetR1b_Stage 2_1": "R1b_Stage 2.1" "R1c_Stage 2.2" | length 2.4
  Bottom Layer w0.8: 49.677,41.021 52.09,41.021
"NetR1b_Stage 3_1": "R1b_Stage 3.1" "R1c_Stage 3.2" | length 2.4
  Bottom Layer w0.8: 80.737,40.95 83.15,40.95
"NetR1b_Stage 4_1": "R1b_Stage 4.1" "R1c_Stage 4.2" | length 2.4
  Bottom Layer w0.8: 66.746,65.649 66.746,68.062
"NetR1b_Stage 5_1": "R1b_Stage 5.1" "R1c_Stage 5.2" | length 2.4
  Bottom Layer w0.8: 37.013,65.908 37.013,68.321
"NetR2b_Stage 1_1": "R2b_Stage 1.1" "R2c_Stage 1.2" | length 2.4
  Bottom Layer w0.8: 10.897,20.193 13.31,20.193
"NetR2b_Stage 2_1": "R2b_Stage 2.1" "R2c_Stage 2.2" | length 2.4
  Bottom Layer w0.8: 42.576,19.756 44.989,19.756
"NetR2b_Stage 3_1": "R2b_Stage 3.1" "R2c_Stage 3.2" | length 2.4
  Bottom Layer w0.8: 73.635,19.685 76.048,19.685
"NetR2b_Stage 4_1": "R2b_Stage 4.1" "R2c_Stage 4.2" | length 2.4
  Bottom Layer w0.8: 88.011,58.547 88.011,60.96
"NetR2b_Stage 5_1": "R2b_Stage 5.1" "R2c_Stage 5.2" | length 2.4
  Bottom Layer w0.8: 15.748,73.01 15.748,75.423
"NetRa1_Stage 1_2": "Ra1_Stage 1.2" "Ra2_Stage 1.2" "Rb1_Stage 1.2" "Rb2_Stage 1.2" "U1_Stage 1.2" | length 37.3
  Bottom Layer w0.8: 14.478,32.801 14.484,32.801 ; 20.874,17.618 18.918,17.618 18.461,18.074 18.461,19.904 18.461,28.824 14.484,32.801 ; 25.873,40.061 25.873,38.029 26.36,37.541 ; 28.159,37.541 26.36,37.541 ; 14.484,32.801 16.815,32.801 21.155,37.141 25.96,37.141 26.36,37.541
"NetRa1_Stage 2_2": "Ra1_Stage 2.2" "Ra2_Stage 2.2" "Rb1_Stage 2.2" "Rb2_Stage 2.2" "U1_Stage 2.2" | length 37.3
  Bottom Layer w0.8: 46.157,32.365 46.162,32.365 ; 52.553,17.181 50.597,17.181 50.14,17.638 50.14,19.467 50.14,28.387 46.162,32.365 ; 57.551,39.624 57.551,37.592 58.039,37.104 ; 59.837,37.104 58.039,37.104 ; 46.162,32.365 48.494,32.365 52.834,36.705 57.639,36.705 58.039,37.104
"NetRa1_Stage 3_2": "Ra1_Stage 3.2" "Ra2_Stage 3.2" "Rb1_Stage 3.2" "Rb2_Stage 3.2" "U1_Stage 3.2" | length 37.3
  Bottom Layer w0.8: 77.216,32.293 77.222,32.293 ; 83.612,17.11 81.656,17.11 81.199,17.566 81.199,19.396 81.199,28.316 77.222,32.293 ; 88.611,39.553 88.611,37.521 89.098,37.033 ; 90.897,37.033 89.098,37.033 ; 77.222,32.293 79.553,32.293 83.893,36.633 88.698,36.633 89.098,37.033
"NetRa1_Stage 4_2": "Ra1_Stage 4.2" "Ra2_Stage 4.2" "Rb1_Stage 4.2" "Rb2_Stage 4.2" "U1_Stage 4.2" | length 37.3
  Bottom Layer w0.8: 68.143,73.523 70.175,73.523 70.663,74.01 ; 70.663,75.809 70.663,74.01 ; 75.403,62.128 75.403,62.134 ; 90.586,68.524 90.586,66.568 90.13,66.111 88.3,66.111 79.38,66.111 75.403,62.134 ; 70.663,74.01 71.063,73.61 71.063,68.805 75.403,64.465 75.403,62.134
"NetRa1_Stage 5_2": "Ra1_Stage 5.2" "Ra2_Stage 5.2" "Rb1_Stage 5.2" "Rb2_Stage 5.2" "U1_Stage 5.2" | length 37.3
  Bottom Layer w0.8: 13.173,65.445 13.173,67.402 13.629,67.858 15.459,67.858 24.379,67.858 28.356,71.836 ; 28.356,71.842 28.356,71.836 ; 33.096,58.161 33.096,59.959 ; 35.616,60.447 33.584,60.447 33.096,59.959 ; 28.356,71.836 28.356,69.505 32.696,65.165 32.696,60.359 33.096,59.959
"NetRa2_Stage 1_1": "Ra2_Stage 1.1" "Ra3_Stage 1.2" | length 2.8
  Bottom Layer w0.8: 28.159,39.827 28.159,42.601
"NetRa2_Stage 2_1": "Ra2_Stage 2.1" "Ra3_Stage 2.2" | length 2.8
  Bottom Layer w0.8: 59.837,39.39 59.837,42.164
"NetRa2_Stage 3_1": "Ra2_Stage 3.1" "Ra3_Stage 3.2" | length 2.8
  Bottom Layer w0.8: 90.897,39.319 90.897,42.093
"NetRa2_Stage 4_1": "Ra2_Stage 4.1" "Ra3_Stage 4.2" | length 2.8
  Bottom Layer w0.8: 65.603,75.809 68.377,75.809
"NetRa2_Stage 5_1": "Ra2_Stage 5.1" "Ra3_Stage 5.2" | length 2.8
  Bottom Layer w0.8: 35.382,58.161 38.156,58.161
"NetRb2_Stage 1_1": "Rb2_Stage 1.1" "Rb3_Stage 1.2" | length 2.4
  Bottom Layer w0.8: 20.747,19.904 23.14,19.904
"NetRb2_Stage 2_1": "Rb2_Stage 2.1" "Rb3_Stage 2.2" | length 2.4
  Bottom Layer w0.8: 52.426,19.467 54.819,19.467
"NetRb2_Stage 3_1": "Rb2_Stage 3.1" "Rb3_Stage 3.2" | length 2.4
  Bottom Layer w0.8: 83.485,19.396 85.878,19.396
"NetRb2_Stage 4_1": "Rb2_Stage 4.1" "Rb3_Stage 4.2" | length 2.4
  Bottom Layer w0.8: 88.3,68.397 88.3,70.79
"NetRb2_Stage 5_1": "Rb2_Stage 5.1" "Rb3_Stage 5.2" | length 2.4
  Bottom Layer w0.8: 15.459,63.18 15.459,65.572
"NetRd1_Stage 1_2": "Rd1_Stage 1.2" "Rd2_Stage 1.2" "Rd3_Stage 1.2" "Rd4_Stage 1.2" "TP?_Stage 1.1" "U1_Stage 1.5" | length 20.4
  Bottom Layer w0.8: 23.495,23.241 23.495,24.932 24.09,25.527 22.693,25.527 22.098,26.122 22.098,27.721 27.046,27.721 27.519,28.194 ; 28.662,22.479 28.662,27.051 27.519,28.194 ; 29.718,28.194 27.519,28.194
"NetRd1_Stage 2_2": "Rd1_Stage 2.2" "Rd2_Stage 2.2" "Rd3_Stage 2.2" "Rd4_Stage 2.2" "TP?_Stage 2.1" "U1_Stage 2.5" | length 20.7
  Bottom Layer w0.8: 54.991,22.733 54.864,22.86 54.864,24.186 55.768,25.09 54.371,25.09 53.777,25.685 53.777,27.285 58.725,27.285 59.197,27.757 ; 60.34,22.042 60.34,26.614 59.197,27.757 ; 61.468,27.813 59.253,27.813 59.197,27.757
"NetRd1_Stage 3_2": "Rd1_Stage 3.2" "Rd2_Stage 3.2" "Rd3_Stage 3.2" "Rd4_Stage 3.2" "TP?_Stage 3.1" "U1_Stage 3.5" | length 20.3
  Bottom Layer w0.8: 86.741,22.733 86.828,22.82 86.828,25.019 85.431,25.019 84.836,25.614 84.836,27.213 89.784,27.213 90.257,27.686 ; 91.4,21.971 91.4,26.543 90.257,27.686 ; 92.583,27.813 90.384,27.813 90.257,27.686
"NetRd1_Stage 4_2": "Rd1_Stage 4.2" "Rd2_Stage 4.2" "Rd3_Stage 4.2" "Rd4_Stage 4.2" "TP?_Stage 4.1" "U1_Stage 4.5" | length 20.4
  Bottom Layer w0.8: 80.137,77.851 80.137,75.296 ; 84.836,71.755 84.821,71.74 82.677,71.74 82.677,70.343 82.082,69.748 80.483,69.748 80.483,74.696 80.01,75.169 80.137,75.296 ; 85.725,76.312 81.153,76.312 80.137,75.296
"NetRd1_Stage 5_2": "Rd1_Stage 5.2" "Rd2_Stage 5.2" "Rd3_Stage 5.2" "Rd4_Stage 5.2" "TP?_Stage 5.1" "U1_Stage 5.5" | length 19.9
  Bottom Layer w0.8: 18.034,57.658 22.606,57.658 23.749,58.801 ; 18.923,62.357 19.05,62.23 21.082,62.23 21.082,63.627 21.677,64.222 23.276,64.222 23.276,59.274 23.749,58.801 ; 23.749,56.769 23.749,58.801
NetS1_1: "U1_Stage 1.6" "U1_Stage 1.7" S1.1 | length 15.2
  Top Layer w0.8: v1(27.305,34.925) 27.432,35.052 v1(31.369,35.052)
  Bottom Layer w0.8: 22.098,30.261 22.098,32.801 25.181,32.801 v1(27.305,34.925) ; v1(31.369,35.052) S1.1
NetS2_1: "U1_Stage 2.6" "U1_Stage 2.7" S2.1 | length 15.4
  Top Layer w0.8: v1(59.055,34.671) v1(63.119,34.671)
  Bottom Layer w0.8: 53.777,29.825 53.777,32.365 57.003,32.365 59.055,34.417 v1(59.055,34.671) ; v1(63.119,34.671) S2.1
NetS3_1: "U1_Stage 3.6" "U1_Stage 3.7" S3.1 | length 27.8
  Top Layer w0.8: v1(90.297,34.671) 93.98,34.671 v1(94.234,34.925)
  Bottom Layer w0.8: 84.836,29.753 84.836,32.293 87.919,32.293 v1(90.297,34.671) ; v1(94.234,34.925) 94.361,35.052 S3.1
NetS4_1: "U1_Stage 4.6" "U1_Stage 4.7" S4.1 | length 33.8
  Top Layer w0.8: v1(72.898,79.248) 72.898,75.565 v1(73.279,75.184)
  Bottom Layer w0.8: S4.1 55.245,79.756 72.39,79.756 v1(72.898,79.248) ; v1(73.279,75.184) 75.403,73.06 75.403,69.748 77.943,69.748
VCC: "Cd1_Stage 1.1" "Cd1_Stage 2.1" "Cd1_Stage 3.1" "Cd1_Stage 4.1" "Cd1_Stage 5.1" "U1_Stage 1.8" "U1_Stage 2.8" "U1_Stage 3.8" "U1_Stage 4.8" "U1_Stage 5.8" SUPPLY.1 | length 187.7
  Top Layer w0.8: 56.444,34.778 56.444,36.139 55.499,37.084 ; 72.863,69.748 71.018,69.748 62.825,61.555 30.769,61.555 29.947,60.732 29.584,60.732 24.765,55.913 24.765,35.214 27.143,37.592 38.608,37.592 40.132,36.068 42.799,36.068 43.815,37.084 55.499,37.084 ; 72.99,72.415 72.99,73.634 73.921,73.634 74.829,74.542 74.829,76.734 v1(75.819,77.724) ; 87.503,34.706 84.998,37.211 76.454,37.211 75.311,36.068 70.866,36.068 69.85,37.084 55.499,37.084
  Bottom Layer w0.8: 22.098,35.341 22.225,35.214 24.765,35.214 ; 30.769,61.555 30.769,64.095 30.896,64.222 ; 53.777,34.905 53.904,34.778 56.444,34.778 ; SUPPLY.1@58.213,88.138 67.056,88.138 75.819,79.375 v1(75.819,77.724) v1@75.819,77.47 ; 72.863,69.748 72.99,69.875 72.99,72.415 ; 84.836,34.833 84.963,34.706 87.503,34.706
VEE: "Cd2_Stage 1.1" "Cd2_Stage 2.1" "Cd2_Stage 3.1" "Cd2_Stage 4.1" "Cd2_Stage 5.1" "U1_Stage 1.4" "U1_Stage 2.4" "U1_Stage 3.4" "U1_Stage 4.4" "U1_Stage 5.4" SUPPLY.3 | length 271.4
  Top Layer w0.8: 15.748,24.165 21.625,18.288 41.986,18.288 47.427,23.729 52.232,18.923 63.5,18.923 67.725,23.148 74.096,23.148 74.605,23.657 78.486,23.657 83.601,18.542 v1@93.345,18.542 ; 23.276,71.842 23.276,75.438 28.864,81.026 28.864,81.188 v1(30.099,82.423) ; 84.039,63.398 84.039,64.989 89.281,70.231 v1(89.281,77.089)
  Bottom Layer w0.8: 14.478,27.721 15.748,26.451 15.748,24.165 ; 19.72,70.572 22.006,70.572 23.276,71.842 ; v1(30.099,82.423) 30.861,83.185 45.292,83.185 SUPPLY.3 48.848,88.773 52.785,92.71 73.66,92.71 v1(89.281,77.089) 95.758,70.612 95.758,53.749 96.161,53.346 96.161,33.804 94.361,32.004 94.361,19.812 v1(93.345,18.796) ; 46.157,27.285 47.427,26.015 47.427,23.729 ; 77.216,27.213 78.486,25.943 78.486,23.657 ; 80.483,62.128 81.753,63.398 84.039,63.398

## Silkscreen, mask and mechanical layers (free items; w line width, h text height)
Top Overlay:
  text "GND" at 55.753,93.599 h1.52 r180
  text "-" at 48.006,92.075 h1.52
  text "+" at 58.928,92.075 h1.52
  text "GND" at 12.573,87.884 h1.52 r180
  text "I5" at 49.276,74.168 h1.52
  text "O4" at 52.832,74.168 h1.52
  text "I4" at 90.043,51.689 h1.52
  text "O3" at 89.789,49.149 h1.52
  text "O1" at 32.258,31.369 h1.52
  text "I2" at 35.433,31.369 h1.52
  text "O2" at 63.373,31.242 h1.52
  text "I3" at 67.056,31.242 h1.52
  text "GND" at 23.368,4.953 h1.52